# Altium PCB PCB1.PcbDoc (part 2 of 2)
Units mm, origin at the board's own origin, x right, y up, seen from the top; angles counter-clockwise.
Board outline 119.6 x 179.6 mm, 2 copper layers (Top Layer, Bottom Layer); 69 components, 72 nets, 360 pads, 26 vias.
Unrouted connection lines stored in the file: 3.
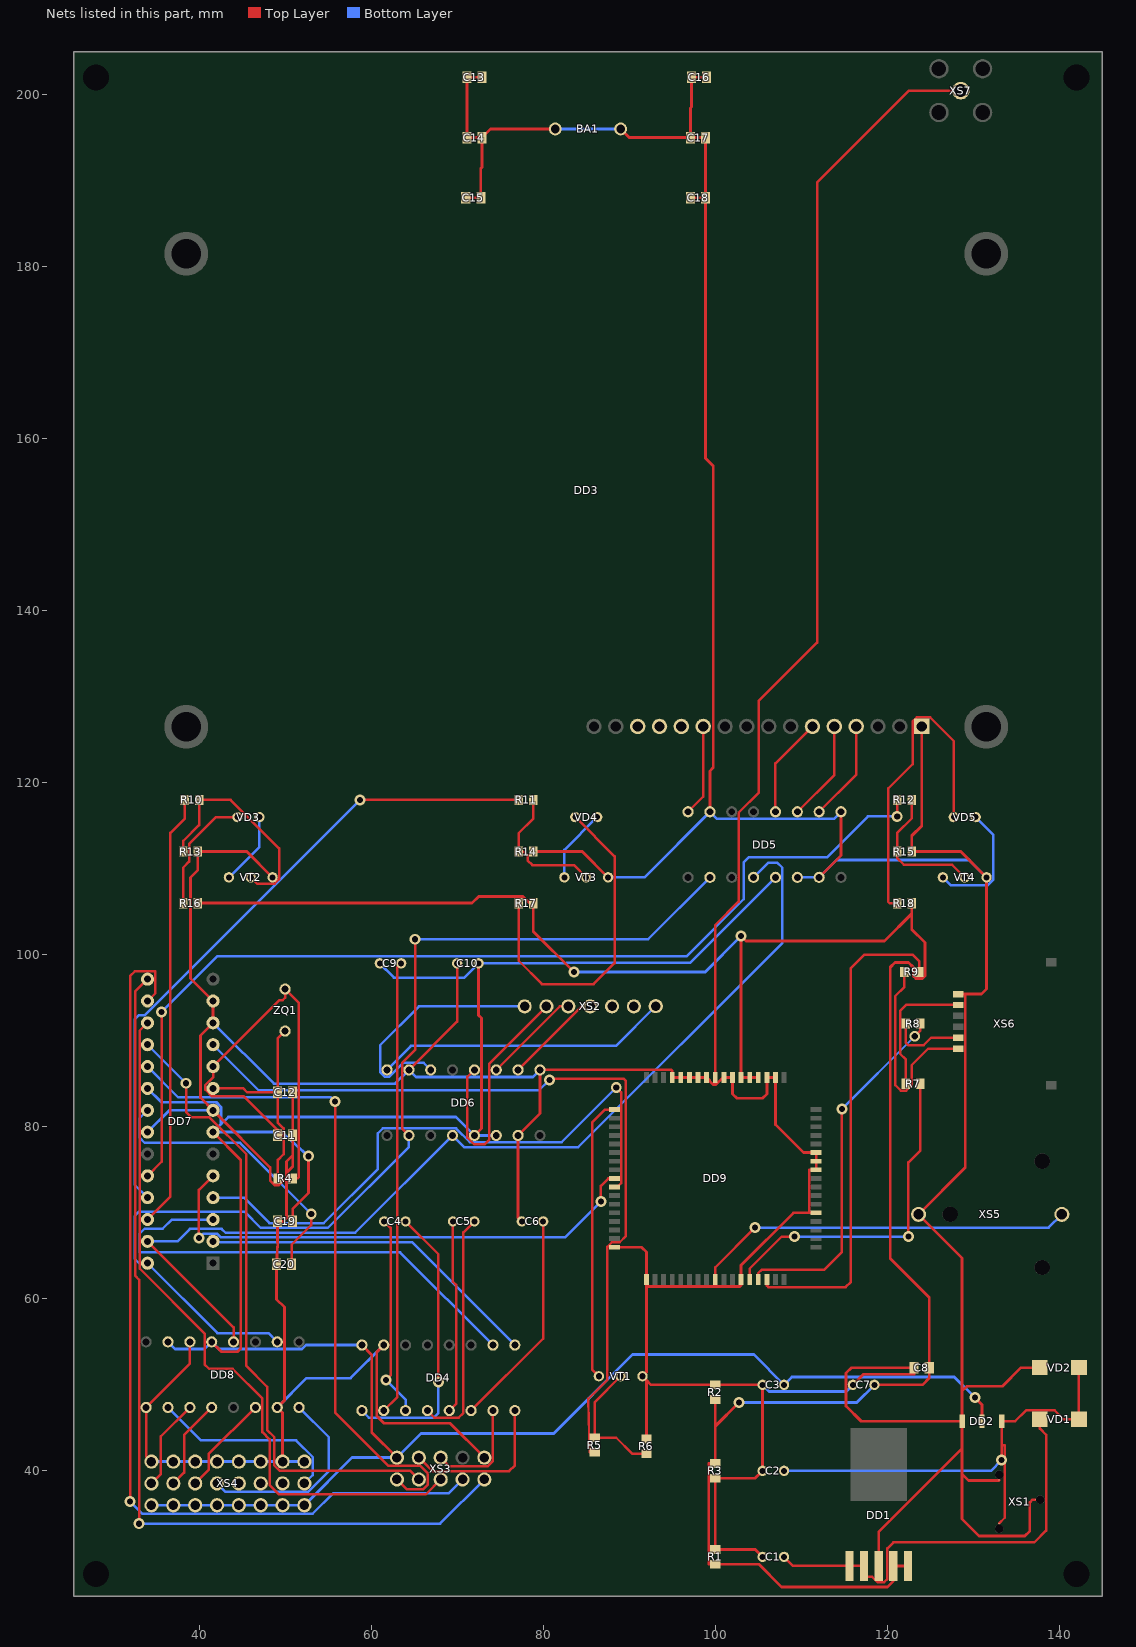
[diagram p2: the nets of this part, all layers, seen from the top]

## Part data
C1 C2 C3 C7: library part cap_pol_10mkF
C4 C5 C6 C9 C10: library part cap_pol_1mkF
C11 C12 C19 C20: library part cap_33pF
DD2: library part stu_NCP1117ST50T3G, "No Description Available", Copyright="Copyright (C) 2016 Accelerated Designs. All rights reserved", Manufacturer_Part_Number=NCP1117ST50T3G, RefDes=RefDes, SourceLibrary=ONSemi_2017-12-12_4, Type=DEV, Vendor="ON Semiconductor"
DD3: "Display Development Tools 20X4 CHARACTER BLUE LCD W/BACKLIGHT", Package=None, Availability=Unavailable, MF=Gravitech, Mouser-Purchase-URL=https://snapeda.com/shop?store=Mouser&id=833821, MP=LCD-20X4B, Price=None, SnapEDA_Link=https://www.snapeda.com/parts/LCD-20X4B/Gravitech/view-part/833821/?ref=snap
DD4: library part micro_MAX232, "No Description Available", Built_By=EMA_UL_Team, Copyright="Copyright (C) 2018 Accelerated Designs. All rights reserved", Manufacturer_Part_Number=MAX232CSE+, RefDes=RefDes, Revision=4, SourceLibrary=Update_to_database_2021-01-29, Type=DEV, Vendor="Maxim Integrated Products"
DD5 DD6 DD8: "Remote 8-Bit I/O Expander for I2C-Bus", Manufacturer="Texas Instruments", PACKAGE_DESIGNATOR=DGV, Copyright="Copyright (C) 2018 Accelerated Designs. All rights reserved", Datasheet_URL=http://www.ti.com/lit/gpn/PCF8574, FAMILY_NAME="I2C IO EXPANDER", GENERIC_PART_NUMBER=PCF8574, INDUSTRY_STD_PKG_TYPE=TVSOP, Manufacturer_Part_Number=PCF8574DGVR, PIN_COUNT=20, RefDes=RefDes, Type=DEV, Vendor="Texas Instruments"
DD7: "No Description Available", Built_By=EMA_UL_Team, Copyright="Copyright (C) 2018 Accelerated Designs. All rights reserved", Manufacturer_Part_Number=ATMEGA328P-PU, RefDes=RefDes, SourceLibrary=Atmel_2011-04-02, Type=DEV, Vendor=Atmel
VD4 VD5: library part diode_red
VT1 VT2 VT3 VT4: library part trans_BC547A
XS1: library part conn_DCJ200-10_powerIn
XS3: library part RS-232
XS4: library part temperature_sensors_connector
XS6: library part conn_SIM7200, "No Description Available", Manufacturer_Part_Number=SIM5051-6-0-18-00-A, Built_By=EMA_Cory, Copyright="Copyright (C) 2018 Accelerated Designs. All rights reserved", Datasheet=https://gct.co/files/drawings/sim5051.pdf, RefDes=RefDes, SourceLibrary=GCT_2020-07-23, Type=DEV, Vendor="Global Connector Technology"
XS7: library part conn_antenn
ZQ1: library part crystal_8mhz

## Free pads (board coordinates)
  round 1 hole 3 unplated: 6(28,28) 6(28,202) 6(142,28) 6(142,202)

## Via types
v1: diameter 1.27, hole 0.711, Top Layer to Bottom Layer, 26 vias

## Nets (pads, with @x,y where several pads share a name; then routed paths per layer and width w, separated by ;. In a path a pad name is that pad's centre, name@x,y a point inside that pad or via, vN(x,y) a via of type N, cw(c..) or ccw(c..) an arc to the next point about the centre after c; other vN are vias at no path point)
+5: C3.2 C9.1 C10.2 C19.2 DD2.2 DD4.16 DD5.5 DD6.5 DD6.6 DD7.7 DD7.20 DD8.5 DD8.7 XS3.2 XS4.1 XS4.4 XS4.7 XS4.10 XS4.13 XS4.16 XS4.19 XS4.22 | length 316.4
  Top Layer w0.323: DD8.5@41.46,55 42.612,53.848 44.441,53.848 44.831,54.238 44.831,76.169 DD7.7@41.62,79.38 ; C19.2@50.874,69 50.874,70.432 52.73,72.288 v1(52.73,76.581) ; DD4.16@58.92,54.62 60.071,53.469 60.071,44.469 XS3.2@63,41.54 ; DD6.5@72,79 72.822,79.822 72.822,92.631 72.489,92.964 C10.2@72.489,99 ; v1(130.175,48.514) 131,47.689 DD2.2@131,45.774
  Bottom Layer w0.323: DD7.20@34,84.46 35.605,82.855 41.986,82.855 42.545,82.296 42.545,80.305 ; XS4.1@34.46,36 XS4.4@37,36 XS4.7@39.54,36 XS4.10@42.08,36 XS4.13@44.62,36 XS4.16@47.16,36 XS4.19@49.7,36 XS4.22@52.24,36 57.78,41.54 XS3.2@63,41.54 65.808,44.348 81.229,44.348 90.399,53.518 104.482,53.518 C3.2@108,50 108.902,50.902 127.787,50.902 v1(130.175,48.514) ; DD8.7@36.38,55 37.202,54.178 40.638,54.178 DD8.5@41.46,55 42.282,54.178 51.968,54.178 52.41,54.62 DD4.16@58.92,54.62 ; v1(52.73,76.581) 49.555,79.38 DD7.7@41.62,79.38 42.545,80.305 ; C9.1@61,99 62.662,97.338 70.827,97.338 C10.2@72.489,99 82.704,99 82.765,99.061 97.061,99.061 DD5.5@107,109 ; DD6.6@74.54,79 DD6.5@72,79 69.847,81.153 43.393,81.153 42.545,80.305
GND: BA1.1 BA1.2 C1.1 C2.1 C3.1 C6.1 C7.1 C8.1 C10.1 C11.2 C12.2 C13.1 C13.2 C14.1 C14.2 C15.1 C15.2 C16.1 C16.2 C17.1 C17.2 C18.1 C18.2 C19.1 C20.1 DD1.3 DD2.1 DD3.1 DD4.15 DD5.6 DD5.7 DD5.9 DD5.15 DD6.7 DD6.9 DD6.15 DD7.8 DD7.12 DD7.13 DD7.22 DD8.6 DD8.9 DD8.15 DD9.17 DD9.18 DD9.29 DD9.39 DD9.44 DD9.45 DD9.46 DD9.53 DD9.54 DD9.58 DD9.59 DD9.61 DD9.62 DD9.63 DD9.64 DD9.65 R1.1 R2.1 R3.1 R6.2 R13.2 R14.2 R15.2 VD2.1 VT1.1 VT2.1 VT3.1 VT4.1 XS1.1 XS1.3 XS3.10 XS4.3 XS4.6 XS4.9 XS4.12 XS4.15 XS4.18 XS4.21 XS4.24 XS5.2 XS6.4 | length 814.5
  Top Layer w0.323: XS4.3@34.46,41.08 33.84,41.7 DD8.9@33.84,47.38 38.92,52.46 DD8.6@38.92,55 ; VT2.1@48.54,109 45.54,112 R13.2@39.848,112 39.848,109.85 38.989,108.991 38.989,97.251 DD7.13@41.62,94.62 DD7.12@41.62,92.08 40.152,90.612 40.152,83.388 DD7.8@41.62,81.92 48.26,75.28 48.26,73.736 48.768,73.228 49.276,73.228 50.165,74.117 ; C19.1@49.126,69 C19.1@49.126,68.986 ; XS4.21@49.7,41.08 49.7,46.76 DD8.15@49.08,47.38 49.911,48.211 49.911,59.033 49,59.944 C20.1@49,64 49.126,66.547 C19.1@49.126,68.986 ; C12.2@50.874,84 C11.2@50.874,79 50.874,76.68 ; DD4.15@61.46,54.62 60.648,53.808 60.648,46.387 61.506,45.53 69.17,45.53 XS3.10@73.16,41.54 ; DD6.15@64.38,86.62 70,92.24 C10.1@70,99 ; C15.1@71,188 C15.2@72.747,188 72.747,191.414 72.874,191.541 C14.2@72.874,195 ; C13.2@72.874,202 C13.1@71.127,202 C14.1@71.127,195 C14.2@72.874,195 ; C6.1@77.511,69 77.08,69.431 DD6.7@77.08,79 79.62,81.54 DD6.9@79.62,86.62 94.869,86.62 95,86.489 DD9.65@95,85.732 DD9.64@96,85.732 DD9.63@97,85.732 DD9.62@98,85.732 DD9.61@99,85.732 99.316,85.417 99.316,85.344 99.747,84.912 100.101,84.912 100.922,85.732 DD9.59@101,85.732 DD9.58@102,85.732 102,83.82 102.508,83.312 105.492,83.312 106,83.82 DD9.54@106,85.732 DD9.53@107,85.732 107,80.249 110.249,77 DD9.46@111.732,77 DD9.45@111.732,76 DD9.44@111.732,75 110.922,75 110.922,70 ; R14.2@78.848,112 84.54,112 VT3.1@87.54,109 ; BA1.2@81.4,196 73.874,196 C14.2@72.874,195 ; DD9.17@88.268,66 91.44,66 92,65.44 DD9.18@92,62.268 92,61.595 ; BA1.1@89,196 90,195 C17.1@97.127,195 ; R6.2@92,43.696 92,50.54 ; C18.1@97.127,188 C18.2@98.874,188 ; C16.2@99,202 C16.1@97.253,202 97.253,198.551 97.127,198.425 C17.1@97.127,195 ; DD5.15@99.38,116.62 99.38,121.361 99.771,121.752 99.771,156.82 98.874,157.717 C18.2@98.874,188 ; C1.1@105.5,30 104.652,30.848 R1.1@100,30.848 R3.1@100,39.152 104.652,39.152 C2.1@105.5,40 C3.1@105.5,50 R2.1@100,50 92.54,50 92,50.54 ; DD9.39@111.732,70 110.922,70 ; DD5.7@112.08,109 114.62,111.54 DD5.9@114.62,116.62 ; C7.1@116,50 117.232,51.232 123.126,51.232 C8.1@123.126,51.994 ; DD1.3@119,28.945 119,32.894 128.701,42.595 ; C8.1@123.126,52 C8.1@123.126,51.994 ; DD3.1@124,126.54 124,114.986 122.848,113.834 R15.2@122.848,112 128.54,112 VT4.1@131.54,109 131.54,96.031 130.939,95.43 128.905,95.43 ; XS6.4@128.25,95.43 128.905,95.43 ; XS1.1@133,38.95 133,38.888 129.437,38.888 128.701,39.624 ; XS1.3@137.2,36.65 136.898,36.65 136.57,36.322 136.57,33.02 135.986,32.436 130.657,32.436 128.701,34.392 128.701,39.624 ; VD2.1@137.73,52 135.566,52 133.4,49.834 129.26,49.834 128.701,49.276 ; C19.1@49.126,68.986 49.809,68.986 50.165,69.342 50.165,74.117 ; 50.165,74.117 50.165,74.651 ; 50.165,74.651 50.165,75.971 50.874,76.68 ; 50.165,74.651 50.874,75.359 50.874,76.68 ; 92,50.54 VT1.1@91.54,51 92,51.46 92,61.595 ; 92,61.595 92.152,61.443 102.87,61.443 103,61.573 DD9.29@103,62.268 103,63.907 109.093,70 110.922,70 ; C17.1@97.127,195 C17.2@98.874,195 C18.2@98.874,188 ; C8.1@123.126,51.994 115.824,51.994 115.214,51.384 115.214,47.523 116.967,45.771 DD2.1@128.701,45.771 ; 128.701,39.624 128.701,42.595 ; 128.701,42.595 DD2.1@128.701,45.771 ; DD2.1@128.701,45.771 128.701,49.276 ; 128.701,49.276 128.701,64.752 XS5.2@123.633,69.821 129.057,75.246 129.057,95.278 128.905,95.43
  Bottom Layer w0.323: DD7.22@34,79.38 36.54,81.92 DD7.8@41.62,81.92 ; XS4.3@34.46,41.08 XS4.6@37,41.08 XS4.9@39.54,41.08 XS4.12@42.08,41.08 XS4.15@44.62,41.08 XS4.18@47.16,41.08 XS4.21@49.7,41.08 XS4.24@52.24,41.08 ; DD7.12@41.62,92.08 48.686,85.014 62.774,85.014 DD6.15@64.38,86.62 65.199,85.801 78.801,85.801 DD6.9@79.62,86.62 ; DD8.15@49.08,47.38 52.475,50.775 57.615,50.775 DD4.15@61.46,54.62 ; BA1.2@81.4,196 BA1.1@89,196 ; VT3.1@87.54,109 91.76,109 DD5.15@99.38,116.62 100.201,115.799 113.799,115.799 DD5.9@114.62,116.62 ; C3.1@105.5,50 106.275,49.225 115.225,49.225 C7.1@116,50 ; DD5.6@109.54,109 DD5.7@112.08,109 114.103,111.023 129.517,111.023 VT4.1@131.54,109
NetC1_2: C1.2 DD1.1 DD1.2 VD1.2 | length 50.2
  Top Layer w0.29: C1.2@108,30 109.055,28.945 DD1.1@115.596,28.945 DD1.2@117.298,28.945 117.298,27.686 118.239,27.686 118.872,27.053 119.634,27.053 120.015,27.434 120.015,30.988 120.701,31.674 137.084,31.674 138.455,33.045 138.455,44.196 137.73,44.922 VD1.2@137.73,46
NetC2_2: C2.2 DD2.3 VD1.1 VD2.2 XS1.2 | length 56
  Top Layer w0.29: XS1.2@133,33.9 133.655,34.555 133.655,42.977 133.299,42.977 ; v1(133.299,41.25) 133.299,42.977 ; VD2.2@142.27,52 VD1.1@142.27,46 140.513,46 139.472,47.041 136.144,47.041 134.877,45.774 DD2.3@133.299,45.774 133.299,42.977
  Bottom Layer w0.29: C2.2@108,40 132.049,40 v1(133.299,41.25)
NetC4_1: C4.1 DD4.3 | length 23.5
  Top Layer w0.29: C4.1@61.511,69 62.255,68.255 62.255,51.105 v1(61.722,50.571)
  Bottom Layer w0.29: v1(61.722,50.571) 64,48.293 DD4.3@64,47
NetC4_2: C4.2 DD4.1 | length 33.3
  Top Layer w0.29: C4.2@64,69 67.818,65.182 v1(67.818,50.343)
  Bottom Layer w0.29: DD4.1@58.92,47 59.717,46.203 67.285,46.203 67.818,46.736 v1(67.818,50.343)
NetC5_1: C5.1 DD4.5 | length 22.5
  Top Layer w0.29: DD4.5@69.08,47 69.875,47.795 69.875,61.62 69.511,61.985 C5.1@69.511,69
NetC5_2: C5.2 DD4.4 | length 27.5
  Top Layer w0.29: DD4.4@66.54,47 67.337,46.203 70.18,46.203 70.714,46.736 70.714,67.714 C5.2@72,69
NetC6_2: C6.2 DD4.6 | length 25.5
  Top Layer w0.29: DD4.6@71.62,47 80,55.38 C6.2@80,69
NetC9_2: C9.2 DD4.2 | length 52.8
  Top Layer w0.29: DD4.2@61.46,47 63.041,48.581 63.041,98.552 C9.2@63.489,99
NetC11_1: C11.1 DD7.10 R4.2 ZQ1.2 | length 50
  Top Layer w0.29: C11.1@49.126,79 49.126,79.629 45.215,83.541 41.5,83.541 40.713,84.328 40.713,84.836 41.62,85.743 DD7.10@41.62,87 49.337,94.717 49.721,94.717 50,94.996 ZQ1.2@50,96 51.562,94.438 51.562,74.127 51.435,74 R4.2@50.848,74
NetC12_1: C12.1 DD7.9 R4.1 ZQ1.1 | length 25.7
  Top Layer w0.29: DD7.9@41.62,84.46 45.136,84.46 45.596,84 C12.1@49.126,84 ; R4.1@49.152,74 49.152,76.152 49.809,76.81 49.809,79.818 49.126,80.501 C12.1@49.126,84 ; ZQ1.1@50,91.12 49.126,90.247 C12.1@49.126,84
NetC20_2: C20.2 DD7.21 | length 34
  Top Layer w0.29: C20.2@50.747,64 50.747,66.292 53.035,68.58 v1(53.035,69.85)
  Bottom Layer w0.29: DD7.21@34,81.92 33.071,80.991 33.071,78.74 33.68,78.13 44.755,78.13 v1(53.035,69.85)
NetDD3_4: DD3.4 DD5.10 | length 11.7
  Top Layer w0.29: DD5.10@112.08,116.62 116.38,120.92 DD3.4@116.38,126.54
NetDD3_5: DD3.5 DD5.11 | length 11.7
  Top Layer w0.29: DD5.11@109.54,116.62 113.84,120.92 DD3.5@113.84,126.54
NetDD3_6: DD3.6 DD5.12 | length 11.7
  Top Layer w0.29: DD5.12@107,116.62 107,122.24 DD3.6@111.3,126.54
NetDD3_11: DD3.11 DD5.16 | length 10.6
  Top Layer w0.29: DD5.16@96.84,116.62 98.6,118.38 DD3.11@98.6,126.54
NetDD3_12: DD3.12
NetDD3_13: DD3.13
NetDD3_14: DD3.14
NetDD4_7: DD4.7 XS3.6 | length 12.6
  Top Layer w0.29: XS3.6@68.08,41.54 69.106,40.514 73.526,40.514 74.16,41.148 DD4.7@74.16,47
NetDD4_8: DD4.8 XS3.4 | length 18.4
  Top Layer w0.29: XS3.4@65.54,41.54 67.11,39.97 76.03,39.97 76.7,40.64 DD4.8@76.7,47
NetDD4_9: DD4.9 DD7.2 | length 40.1
  Bottom Layer w0.29: DD7.2@41.62,66.68 41.983,66.68 41.983,66.591 64.729,66.591 DD4.9@76.7,54.62
NetDD4_10: DD4.10 DD7.3 | length 56.9
  Bottom Layer w0.29: DD7.3@41.62,69.22 36.835,69.22 35.763,68.148 33.655,68.148 33.071,67.564 33.071,65.43 33.096,65.405 63.375,65.405 DD4.10@74.16,54.62
NetDD5_2: DD5.2 DD6.2 DD7.28 DD8.2 | length 124.6
  Top Layer w0.29: DD6.2@64.38,79 63.585,79.795 63.585,87.427 65.1,88.942 v1(65.1,101.803)
  Bottom Layer w0.29: DD8.2@49.08,55 48.073,56.007 42.133,56.007 DD7.28@34,64.14 33.02,64.14 32.512,64.648 32.512,69.621 33.02,70.129 45.281,70.129 47.146,68.265 54.98,68.265 64.38,77.664 DD6.2@64.38,79 ; v1(65.1,101.803) 92.183,101.803 DD5.2@99.38,109
NetDD5_4: DD5.4 DD6.4 DD7.27 DD8.4 | length 118.5
  Top Layer w0.29: DD7.27@34,66.68 44,56.68 DD8.4@44,55
  Bottom Layer w0.29: DD7.27@34,66.68 37.476,66.68 38.935,68.139 42.611,68.139 43.071,67.679 58.139,67.679 DD6.4@69.46,79 70.812,77.648 84.072,77.648 107.798,101.374 107.798,110.109 107.188,110.719 106.179,110.719 DD5.4@104.46,109
NetDD6_10: DD6.10 XS2.4 | length 11.4
  Top Layer w0.29: DD6.10@77.08,86.62 84.46,94 XS2.4@85.46,94
NetDD6_11: DD6.11 XS2.5 | length 11.4
  Top Layer w0.29: DD6.11@74.54,86.62 81.92,94 XS2.5@82.92,94
NetDD6_12: DD6.12 XS2.6 | length 29.5
  Top Layer w0.29: DD6.12@72,86.62 71.196,85.816 71.196,78.74 71.984,77.953 73.152,77.953 73.736,78.537 73.736,87.356 XS2.6@80.38,94
NetDD6_14: DD6.14 XS2.7 | length 28.9
  Bottom Layer w0.29: DD6.14@66.92,86.62 66.113,87.427 63.703,87.427 62.078,85.801 61.595,85.801 61.036,86.36 61.036,89.484 65.552,94 XS2.7@77.84,94
NetDD6_16: DD6.16 XS2.1 | length 34.3
  Bottom Layer w0.29: DD6.16@61.84,86.62 64.628,89.408 88.463,89.408 XS2.1@93.08,94.025
NetDD6_17: XS2.2
NetDD6_19: XS2.3
NetDD7_4: DD7.4 DD9.10 | length 70.7
  Top Layer w0.29: DD9.10@88.268,73 88.621,73 89.058,73.437 89.058,83.992 v1(88.494,84.557)
  Bottom Layer w0.29: DD7.4@41.62,71.76 45.207,71.76 48.158,68.809 54.483,68.809 60.782,75.108 60.782,79.248 61.341,79.807 69.875,79.807 71.477,78.205 82.142,78.205 v1(88.494,84.557)
NetDD7_5: DD7.5 DD9.9 | length 60.5
  Top Layer w0.29: v1(39.98,67.081) 39.98,72.66 DD7.5@41.62,74.3 ; v1(86.716,71.323) 86.716,73.127 87.589,74 DD9.9@88.268,74
  Bottom Layer w0.29: v1(39.98,67.081) 40.485,67.587 42.067,67.587 42.52,67.135 82.527,67.135 v1(86.716,71.323)
NetDD7_11: DD7.11 R5.1 | length 97
  Top Layer w0.29: v1(80.721,85.446) 80.886,85.61 89.345,85.61 89.611,85.344 89.611,67.285 88.9,66.573 87.986,66.573 87.452,66.04 87.452,50.597 85.242,48.387 85.381,42.152 R5.1@86,42.152
  Bottom Layer w0.29: DD7.11@41.62,89.54 46.908,84.252 79.527,84.252 v1(80.721,85.446)
NetDD7_15: DD7.15 XS3.9 | length 106.4
  Top Layer w0.29: v1(33.02,33.858) 33.02,62.218 32.549,62.689 32.549,95.709 DD7.15@34,97.16
  Bottom Layer w0.29: v1(33.02,33.858) 68.018,33.858 XS3.9@73.16,39
NetDD7_16: DD7.16 XS3.7 | length 108.9
  Top Layer w0.29: v1(31.979,36.424) 31.979,97.536 32.512,98.069 34.882,98.069 34.907,95.527 DD7.16@34,94.62
  Bottom Layer w0.29: v1(31.979,36.424) 33.372,35.03 53.213,35.03 55.572,37.389 69.009,37.389 XS3.7@70.62,39
NetDD7_17: DD7.17 XS3.5 | length 83
  Top Layer w0.29: DD7.17@34,92.08 33.093,91.173 33.093,63.503 40.64,55.956 40.64,52.375 41.148,51.867 43.891,51.867 47.346,48.412 47.346,44.501 48.186,43.66 48.186,38.352 49.276,37.262 66.342,37.262 XS3.5@68.08,39
NetDD7_18: DD7.18 XS3.3 | length 73.7
  Top Layer w0.29: v1(38.481,85.059) 38.481,81.737 39.116,81.102 41.199,81.102 45.491,76.81 45.491,52.197 47.904,49.784 47.904,44.755 48.73,43.929 48.73,40.64 49.344,40.026 64.514,40.026 XS3.3@65.54,39
  Bottom Layer w0.29: DD7.18@34,89.54 v1(38.481,85.059)
NetDD7_19: DD7.19 XS3.1 | length 79
  Top Layer w0.29: v1(55.804,82.931) 55.804,46.793 62.027,40.57 65.729,40.57 66.599,39.7 66.599,38.405 66.04,37.846 64.154,37.846 XS3.1@63,39
  Bottom Layer w0.29: DD7.19@34,87 37.561,83.439 55.296,83.439 v1(55.804,82.931)
NetDD7_24: DD7.24 R12.1 | length 119.1
  Top Layer w0.29: DD7.24@34,74.3 35.636,75.936 v1(35.636,93.345) ; v1(121.152,116.078) R12.1@121.152,118
  Bottom Layer w0.29: v1(35.636,93.345) 42.139,99.847 96.698,99.847 103.302,106.451 103.302,110.744 103.911,111.354 113.03,111.354 117.754,116.078 v1(121.152,116.078)
NetDD7_25: DD7.25 R11.1 | length 76.5
  Top Layer w0.29: v1(58.716,118) R11.1@77.152,118
  Bottom Layer w0.29: DD7.25@34,71.76 32.512,73.248 32.512,92.481 33.02,92.989 33.706,92.989 v1(58.716,118)
NetDD7_26: DD7.26 R10.1 | length 50.6
  Top Layer w0.29: DD7.26@34,69.22 36.67,71.89 36.67,114.165 38.304,115.799 R10.1@38.304,118
NetDD8_10: DD8.10 XS4.23 | length 22.7
  Bottom Layer w0.29: DD8.10@36.38,47.38 40.224,43.536 51.283,43.536 53.213,41.605 53.213,39.513 XS4.23@52.24,38.54
NetDD8_11: DD8.11 XS4.2 | length 10.7
  Top Layer w0.29: XS4.2@34.46,38.54 35.56,39.64 35.56,44.02 DD8.11@38.92,47.38
NetDD8_12: DD8.12 XS4.5 | length 10.7
  Top Layer w0.29: XS4.5@37,38.54 38.262,39.802 38.262,44.182 DD8.12@41.46,47.38
NetDD8_14: DD8.14 XS4.8 | length 11.7
  Top Layer w0.29: XS4.8@39.54,38.54 41.11,40.11 41.11,41.95 DD8.14@46.54,47.38
NetDD8_16: DD8.16 XS4.11 | length 23.3
  Bottom Layer w0.29: XS4.11@42.08,38.54 43.053,37.567 52.68,37.567 55.093,39.98 55.093,43.907 DD8.16@51.62,47.38
NetDD8_17: XS4.14
NetDD8_19: XS4.17
NetDD8_20: XS4.20
NetDD9_1: DD9.1 VT1.3 | length 33
  Top Layer w0.29: VT1.3@86.46,51 85.682,51.778 85.682,80.5 87.182,82 DD9.1@88.268,82
NetDD9_26: DD9.26 XS5.1 | length 44.2
  Top Layer w0.29: DD9.26@100,62.268 100,63.652 v1(104.623,68.275)
  Bottom Layer w0.29: v1(104.623,68.275) 138.747,68.275 XS5.1@140.292,69.821
NetDD9_30: DD9.30 R7.2 | length 39.6
  Top Layer w0.29: DD9.30@104,62.268 104,63.5 107.734,67.234 v1(109.195,67.234) ; v1(122.453,67.234) 122.453,75.868 123.848,77.262 R7.2@123.848,85
  Bottom Layer w0.29: v1(109.195,67.234) v1(122.453,67.234)
NetDD9_31: DD9.31 R8.2 | length 41.8
  Top Layer w0.29: DD9.31@105,62.268 105,62.992 105.381,63.373 112.649,63.373 114.732,65.456 v1(114.732,82.067) ; v1(123.19,90.526) 123.848,91.184 R8.2@123.848,92
  Bottom Layer w0.29: v1(114.732,82.067) v1(123.19,90.526)
NetDD9_32: DD9.32 R9.2 | length 57.5
  Top Layer w0.29: DD9.32@106,62.268 106,61.538 106.172,61.366 115.164,61.366 115.773,61.976 115.773,98.45 117.348,100.025 122.936,100.025 123.696,99.265 R9.2@123.696,98
NetDD9_60: DD9.60 XS7.1 | length 130.1
  Top Layer w0.29: DD9.60@100,85.732 100,103.454 102.718,106.172 102.718,116.51 105.08,118.872 105.08,129.54 111.836,136.296 111.836,189.789 122.507,200.46 XS7.1@128.54,200.46
NetR5_2: R5.2 R6.1 VT1.2 | length 15.2
  Top Layer w0.29: VT1.2@89,51 86,48 R5.2@86,43.848 88.486,43.848 90.334,42 R6.1@92,42
NetR7_1: R7.1 XS6.1 | length 15.8
  Top Layer w0.29: R7.1@122.152,85 122.152,87.83 121.488,88.494 121.488,93.472 122.176,94.16 XS6.1@128.25,94.16
NetR8_1: R8.1 XS6.6 | length 8.8
  Top Layer w0.29: R8.1@122.152,92 122.152,89.756 122.428,89.48 124.22,89.48 125.09,90.35 XS6.6@128.25,90.35
NetR9_1: R9.1 XS6.3 | length 24.6
  Top Layer w0.29: R9.1@122,98 122,96.27 120.929,95.199 120.929,84.836 121.564,84.201 122.199,84.201 122.834,84.836 122.834,87.15 124.764,89.08 XS6.3@128.25,89.08
NetR10_2: R10.2 R13.1 VT2.2 | length 25.8
  Top Layer w0.29: R13.1@38.152,112 38.152,113.234 40,115.082 R10.2@40,118 43.663,118 49.301,112.361 49.301,108.788 48.768,108.255 46.745,108.255 VT2.2@46,109
NetR11_2: R11.2 R14.1 VT3.2 | length 16.1
  Top Layer w0.29: R11.2@78.848,118 78.848,115.844 77.152,114.148 R14.1@77.152,112 77.724,112 78.181,111.543 78.181,110.973 78.74,110.414 83.586,110.414 VT3.2@85,109
NetR12_2: R12.2 R15.1 VT4.2 | length 16.2
  Top Layer w0.29: R12.2@122.848,118 122.848,115.844 121.152,114.148 R15.1@121.152,112 121.152,111.233 121.92,110.465 127.535,110.465 VT4.2@129,109
NetR16_1: R16.1 VD3.1 | length 14.1
  Top Layer w0.29: R16.1@38.152,106 38.152,110.136 38.837,110.82 38.837,112.878 41.959,116 VD3.1@44.46,116
NetR17_1: R17.1 VD4.1 | length 38.8
  Top Layer w0.29: R17.1@77.152,106 77.152,99.302 79.858,96.596 85.852,96.596 88.29,99.035 88.29,111.44 VD4.1@83.73,116
NetR18_1: R18.1 VD5.1 | length 38.2
  Top Layer w0.29: R18.1@121.152,106 120.269,106 120.117,106.152 120.117,119.329 122.936,122.149 122.936,127.102 123.444,127.61 124.968,127.61 127.73,124.848 VD5.1@127.73,116
NetVD3_2: VD3.2 VT2.3 | length 8.5
  Bottom Layer w0.29: VT2.3@43.46,109 47,112.54 VD3.2@47,116
NetVD4_2: VD4.2 VT3.3 | length 8.6
  Bottom Layer w0.29: VT3.3@82.46,109 82.46,112.19 VD4.2@86.27,116
NetVD5_2: VD5.2 VT4.3 | length 14.6
  Bottom Layer w0.29: VT4.3@126.46,109 127.358,108.102 131.699,108.102 132.309,108.712 132.309,113.961 VD5.2@130.27,116
VBAT: C7.2 C8.2 DD1.4 DD1.5 DD9.55 DD9.56 DD9.57 R1.2 R2.2 R3.2 R16.2 R17.2 R18.2 | length 248.5
  Top Layer w0.323: R16.2@39.848,106 71.72,106 72.502,106.782 77.622,106.782 78.404,106 R17.2@78.848,106 78.848,102.711 v1(83.566,97.993) ; R2.2@100,48.304 100,45.187 ; v1(102.768,47.955) 100,45.187 ; DD9.55@105,85.732 DD9.56@104,85.732 DD9.57@103,85.732 v1(103,102.159) 103.559,101.6 119.685,101.6 122.848,104.763 ; C7.2@118.5,50 124.074,50 124.874,50.8 C8.2@124.874,52 124.874,60.14 120.345,64.668 120.345,98.552 120.904,99.111 122.453,99.111 123.012,98.552 123.012,97.536 123.317,97.231 124.079,97.231 124.384,97.536 124.384,101.422 122.848,102.958 122.848,104.763 ; DD1.5@122.404,28.945 DD1.4@120.702,28.945 120.702,27.178 120.016,26.492 107.721,26.492 105.062,29.152 R1.2@100,29.152 99.238,29.152 99.238,40.848 R3.2@100,40.848 100,44.552 100,45.187 ; R18.2@122.848,106 122.848,104.763
  Bottom Layer w0.323: v1(83.566,97.993) 98.834,97.993 v1(103,102.159) ; v1(102.768,47.955) 116.455,47.955 C7.2@118.5,50
pads on no net: DD1.6 DD3.2 DD3.3 DD3.7 DD3.8 DD3.9 DD3.10 DD3.15 DD3.16 DD3.S1 DD3.S2 DD3.S3 DD3.S4 DD4.11 DD4.12 DD4.13 DD4.14 DD5.1 DD5.3 DD5.8 DD5.13 DD5.14 DD6.1 DD6.3 DD6.8 DD6.13 DD7.1 DD7.6 DD7.14 DD7.23 DD8.1 DD8.3 DD8.8 DD8.13 DD9.2 DD9.3 DD9.4 DD9.5 DD9.6 DD9.7 DD9.8 DD9.11 DD9.12 DD9.13 DD9.14 DD9.15 DD9.16 DD9.19 DD9.20 DD9.21 DD9.22 DD9.23 DD9.24 DD9.25 DD9.27 DD9.28 DD9.33 DD9.34 DD9.35 DD9.36 DD9.37 DD9.38 DD9.40 DD9.41 DD9.42 DD9.43 DD9.47 DD9.48 DD9.49 DD9.50 DD9.51 DD9.52 DD9.66 DD9.67 DD9.68 XS1. XS3.8 XS5. XS6. XS6.2 XS6.5 XS7.2 XS7.3 XS7.4 XS7.5

## Silkscreen, mask and mechanical layers (free items; w line width, h text height)
Mechanical 7:
  text "BOASFORMAT|А1|1|0|766141733|331102362|1000000000|1:1|" at 0,2540 h0
  text "DimV|0|-141338583|126771654|963385827|6692913|-72834646|2||||js12|False|False|False|False" at 322,2447 h0
  text "DimH|-94094489|0|126771654|963385827|-47637796|14173228|2||||js12|False|False|False|False" at 322,2447 h0
  text "BOASVIADRILLTABLE:none,280000,26" at 0,0 h0
  text "2BOASDRILLTABLE:none,275591,есть,36,True|none,314961,есть,66,True|none,320000,есть,28,True|none,393701,есть,5,True|none,433071,есть,41,True|none,472441,есть,18,True|none,590551,есть,1,True|none,669291,есть,4,True|none,708661,нет,3,False|none,1181102,нет,4,False|none,1338583,есть,4,True" at 0,0 h0
Mechanical 8:
  region: 338.908,2446.908 338.261,2445.215 337.77,2441.501 338.904,2441.5 338.905,2442.432 338.342,2442 338.997,2446.907
  region: 339.092,2446.908 339.739,2445.215 340.23,2441.501 339.096,2441.5 339.095,2442.432 339.658,2442 339.003,2446.907
  region: 339.092,2088.092 339.739,2089.785 340.23,2093.499 339.096,2093.5 339.095,2092.568 339.658,2093 339.003,2088.093
  region: 338.908,2088.092 338.261,2089.785 337.77,2093.499 338.904,2093.5 338.905,2092.568 338.342,2093 338.997,2088.093
  region: 321.908,2483.092 320.215,2483.739 316.501,2484.23 316.5,2483.096 317.432,2483.095 317,2483.658 321.907,2483.003
  region: 321.908,2482.908 320.215,2482.261 316.501,2481.77 316.5,2482.904 317.432,2482.905 317,2482.342 321.907,2482.997
  region: 83.092,2482.908 84.785,2482.261 88.499,2481.77 88.5,2482.904 87.568,2482.905 88,2482.342 83.093,2482.997
  region: 83.092,2483.092 84.785,2483.739 88.499,2484.23 88.5,2483.096 87.568,2483.095 88,2483.658 83.093,2483.003
Mechanical 9:
  region: 339,2447 339.658,2442 339,2442.5 338.342,2442
  region: 339,2088 338.342,2093 339,2092.5 339.658,2093
  region: 322,2483 317,2482.342 317.5,2483 317,2483.658
  region: 83,2483 88,2483.658 87.5,2483 88,2482.342
  lines w0.18: 83,2447 83,2484 ; 83,2483 322,2483 ; 322,2088 340,2088 ; 322,2484 322,2447 340,2447 ; 339,2088 339,2447
  text "120" at 196.965,2485.53 h7.68
  text "180" at 336.47,2261.429 h7.68 r90
Mechanical 13:
  lines w0.18: 651,1956 716,1956 ; 651,1961 716,1961 ; 651,1966 716,1966 ; 651,1971 716,1971 ; 651,1976 716,1976 ; 651,1991 716,1991 ; 651,1996 716,1996 ; 651,2001 716,2001 ; 790.96,1971 790.96,1986 ; 795.98,1971 795.98,1986 ; 812.7,2522.1 815.8,2516.7 821.4,2526.5 ; 0,1946 0,2540 841,2540 841,1946 0,1946
  lines w0.6: 8,1976 20,1976 ; 8,2011 20,2011 ; 8,2036 20,2036 ; 8,2061 20,2061 ; 8,2178 20,2178 ; 13,1951 13,2096 ; 13,2118 13,2238 ; 20,2096 8,2096 8,1951 20,1951 ; 20,2118 8,2118 8,2238 20,2238 ; 20,2521 90,2521 ; 104,2521 104,2535 ; 104,2528 156,2528 ; 651,1951 651,2006 836,2006 ; 651,1981 716,1981 ; 651,1986 716,1986 ; 658,1981 658,2006 ; 668,1951 668,2006 ; 691,1951 691,2006 ; 706,1951 706,2006 ; 716,1951 716,2006 ; 716,1966 786,1966 836,1966 ; 716,1991 836,1991 ; 765,2524 770,2515 777.6,2529 ; 777.7,2529 828,2529 ; 786,1951 786,1991 ; 786,1971 836,1971 ; 786,1986 801,1986 836,1986 ; 801,1971 801,1991 ; 806.57,1966 806.57,1971 ; 818,1971 818,1991 ; 20,1951 836,1951 836,2535 20,2535 20,1951 ; 90,2521 90,2535 156,2535 156,2521 90,2521 ; 716,2006 716,2014 836,2014 836,2006 ; 716,2006 836,2006
  text "Rz 160" at 777.7,2516.7 h10.75
  text "(" at 809,2516.7 h10.75
  text ")" at 820,2516.7 h10.75
  text "Перв. примен." at 12.249,2195.536 h5.38 r90
  text "Справ. №" at 12.249,2139.516 h5.38 r90
  text "Подп. и дата" at 12.249,2067.038 h5.38 r90
  text "Инв. № дубл." at 12.249,2037.663 h5.38 r90
  text "Взам. инв. №" at 12.249,2012.667 h5.38 r90
  text "Лит." at 789.728,1986.751 h5.38
  text "Масса" at 804.232,1986.751 h5.38
  text "Масштаб" at 818.813,1986.751 h5.38
  text "Подп. и дата" at 12.249,1983.538 h5.38 r90
  text "№ докум." at 671.975,1982.251 h5.38
  text "Изм." at 651.166,1981.751 h5.38
  text "Лист" at 658.288,1981.751 h5.38
  text "Подп." at 694.228,1981.751 h5.38
  text "Дата" at 706.188,1981.751 h5.38
  text "Разраб." at 651.533,1976.771 h5.38
  text "19 г" at 804.73,1976.001 h7.68
  text "1:1" at 824.426,1976.001 h7.68
  text "Пров." at 651.533,1971.771 h5.38
  text "Т.контр." at 651.533,1966.771 h5.38
  text "Лист" at 787.442,1966.771 h5.38
  text "Листов" at 808.485,1966.771 h5.38
  text "1" at 828.318,1966.771 h5.38
  text "Н.контр." at 651.533,1956.771 h5.38
  text "Инв. № подл." at 12.249,1952.663 h5.38 r90
  text "Утв." at 651.533,1951.771 h5.38
  text "Копировал" at 726.533,1946.771 h5.38
  text "Формат" at 796.533,1946.771 h5.38
  text "А1" at 817.686,1946.771 h5.38

## Text inside footprints (layer, text, board x,y; h text height)
BA1: Top Overlay "-" at 77.169,196.127 h1.27 r180; Top Overlay "+" at 94.337,196 h1.27 r180
DD1: Top Overlay "*" at 113.793,28.31 h1.27
DD4: Top Overlay "*" at 58.133,46.682 h1.27 r90
DD5: Top Overlay "*" at 96.065,108.683 h1.27 r90
DD6: Top Overlay "*" at 61.065,78.682 h1.27 r90
DD7: Top Overlay "*" at 41.938,63.251 h1.27 r180
DD8: Top Overlay "*" at 52.395,55.317 h1.27 r270
DD9: Top Overlay "*" at 86.67,81.865 h1.27
Designator1: Mechanical 7 "92" at 309.836,2078.8 h7.68; Mechanical 7 "88" at 299.68,2078.8 h7.68; Mechanical 7 "84" at 290.074,2078.8 h7.68; Mechanical 7 "80" at 279.595,2078.8 h7.68; Mechanical 7 "76" at 270.231,2078.8 h7.68; Mechanical 7 "72" at 260.014,2078.8 h7.68; Mechanical 7 "68" at 249.68,2078.8 h7.68; Mechanical 7 "64" at 240.074,2078.8 h7.68; Mechanical 7 "60" at 229.595,2078.8 h7.68; Mechanical 7 "56" at 219.879,2078.8 h7.68; Mechanical 7 "52" at 209.662,2078.8 h7.68; Mechanical 7 "48" at 199.733,2078.8 h7.68; Mechanical 7 "44" at 190.128,2078.8 h7.68; Mechanical 7 "40" at 179.648,2078.8 h7.68; Mechanical 7 "36" at 169.879,2078.8 h7.68; Mechanical 7 "32" at 159.662,2078.8 h7.68; Mechanical 7 "28" at 149.555,2078.8 h7.68; Mechanical 7 "24" at 139.95,2078.8 h7.68; Mechanical 7 "20" at 129.47,2078.8 h7.68; Mechanical 7 "16" at 120.775,2078.8 h7.68; Mechanical 7 "12" at 110.558,2078.8 h7.68; Mechanical 7 "8" at 101.29,2078.8 h7.68; Mechanical 7 "4" at 91.738,2078.8 h7.68; Mechanical 7 "0" at 81.205,2078.8 h7.68; Mechanical 7 "140" at 70.867,2435.501 h7.68; Mechanical 7 "136" at 71.691,2425.501 h7.68; Mechanical 7 "132" at 71.258,2415.501 h7.68; Mechanical 7 "128" at 71.037,2405.501 h7.68; Mechanical 7 "124" at 71.827,2395.501 h7.68; Mechanical 7 "120" at 70.867,2385.501 h7.68; Mechanical 7 "116" at 72.402,2375.501 h7.68; Mechanical 7 "112" at 71.969,2365.501 h7.68; Mechanical 7 "108" at 71.037,2355.501 h7.68; Mechanical 7 "104" at 71.827,2345.501 h7.68; Mechanical 7 "100" at 70.867,2335.501 h7.68; Mechanical 7 "96" at 73.106,2325.501 h7.68; Mechanical 7 "92" at 72.673,2315.501 h7.68; Mechanical 7 "88" at 72.36,2305.501 h7.68; Mechanical 7 "84" at 73.149,2295.501 h7.68; Mechanical 7 "80" at 72.189,2285.501 h7.68; Mechanical 7 "76" at 73.462,2275.501 h7.68; Mechanical 7 "72" at 73.028,2265.501 h7.68; Mechanical 7 "68" at 72.36,2255.501 h7.68; Mechanical 7 "64" at 73.149,2245.501 h7.68; Mechanical 7 "60" at 72.189,2235.501 h7.68; Mechanical 7 "56" at 72.758,2225.501 h7.68; Mechanical 7 "52" at 72.324,2215.501 h7.68; Mechanical 7 "48" at 72.466,2205.501 h7.68; Mechanical 7 "44" at 73.256,2195.501 h7.68; Mechanical 7 "40" at 72.296,2185.501 h7.68; Mechanical 7 "36" at 72.758,2175.501 h7.68; Mechanical 7 "32" at 72.324,2165.501 h7.68; Mechanical 7 "28" at 72.111,2155.501 h7.68; Mechanical 7 "24" at 72.9,2145.501 h7.68; Mechanical 7 "20" at 71.94,2135.501 h7.68; Mechanical 7 "16" at 74.549,2125.501 h7.68; Mechanical 7 "12" at 74.116,2115.501 h7.68; Mechanical 7 "8" at 75.58,2105.501 h7.68; Mechanical 7 "4" at 76.476,2095.501 h7.68; Mechanical 7 "0" at 75.41,2085.501 h7.68
Designator1: Mechanical 7 "А(2:1)" at 189.094,2462.92 h15.36; Mechanical 7 "Слой маркировки" at 172.824,2451.2 h10.72; Mechanical 12 "C15" at 172.874,2416.832 h3.05; Mechanical 12 "R10" at 107.532,2276.68 h3.05; Mechanical 12 "VD1" at 305.656,2134.292 h3.05; Mechanical 12 "R15" at 273.228,2264.68 h3.05; Mechanical 12 "XS1" at 289.183,2120.294 h3.05; Mechanical 12 "C16" at 225.38,2444.832 h3.05; Mechanical 12 "C13" at 173.127,2444.832 h3.05; Mechanical 12 "C11" at 129.127,2198.832 h3.05; Mechanical 12 "DD4" at 146.711,2150.025 h3.05; Mechanical 12 "C20" at 128.874,2168.832 h3.05; Mechanical 12 "DD8" at 97.89,2150.789 h3.05; Mechanical 12 "VD2" at 304.215,2146.262 h3.05; Mechanical 12 "R12" at 273.228,2276.68 h3.05; Mechanical 12 "R18" at 273.228,2252.68 h3.05; Mechanical 12 "XS6" at 287.165,2238.774 h3.05; Mechanical 12 "R9" at 274.96,2236.705 h3.05; Mechanical 12 "R8" at 275.246,2224.684 h3.05; Mechanical 12 "R7" at 275.216,2210.663 h3.05; Mechanical 12 "XS5" at 273.341,2197.961 h3.05; Mechanical 12 "DD2" at 287.266,2145.436 h3.05; Mechanical 12 "C8" at 277.127,2144.832 h3.05; Mechanical 12 "C7" at 260.771,2145.15 h3.05; Mechanical 12 "DD1" at 259.354,2129.329 h3.05; Mechanical 12 "C17" at 225.127,2430.832 h3.05; Mechanical 12 "C14" at 173.127,2430.832 h3.05; Mechanical 12 "C18" at 225.127,2416.832 h3.05; Mechanical 12 "VD4" at 195.317,2277.099 h3.05; Mechanical 12 "DD5" at 222.551,2274.003 h3.05; Mechanical 12 "VT3" at 195.541,2260.656 h3.05; Mechanical 12 "DD9" at 205.911,2212.759 h3.05; Mechanical 12 "ZQ1" at 127.095,2237.804 h3.05; Mechanical 12 "C9" at 148.485,2242.896 h3.05; Mechanical 12 "C12" at 129.127,2208.832 h3.05; Mechanical 12 "R4" at 129.228,2188.68 h3.05; Mechanical 12 "C19" at 129.127,2178.832 h3.05; Mechanical 12 "XS3" at 147.347,2124.245 h3.05; Mechanical 12 "DD7" at 98.438,2237.617 h3.05; Mechanical 12 "XS4" at 97.405,2123.974 h3.05; Mechanical 12 "R1" at 230.777,2102.173 h3.05; Mechanical 12 "R14" at 185.228,2264.68 h3.05; Mechanical 12 "C6" at 181.507,2182.896 h3.05; Mechanical 12 "C5" at 165.507,2182.896 h3.05; Mechanical 12 "C4" at 149.507,2182.896 h3.05; Mechanical 12 "R13" at 107.228,2264.68 h3.05; Mechanical 12 "VD5" at 283.317,2277.099 h3.05; Mechanical 12 "VT4" at 283.524,2260.643 h3.05; Mechanical 12 "*" at 259.786,2093.82 h2.54; Mechanical 12 "R2" at 230.777,2140.476 h3.05; Mechanical 12 "C3" at 239.771,2145.15 h3.05; Mechanical 12 "R3" at 230.745,2122.188 h3.05; Mechanical 12 "C2" at 239.771,2125.15 h3.05; Mechanical 12 "C1" at 239.771,2105.15 h3.05; Mechanical 12 "+" at 220.875,2429.2 h2.55 r180; Mechanical 12 "R6" at 214.743,2127.91 h3.05; Mechanical 12 "VT1" at 203.567,2144.666 h3.05; Mechanical 12 "R5" at 202.767,2128.215 h3.05; Mechanical 12 "BA1" at 184.848,2446.26 h3.05; Mechanical 12 "R11" at 185.228,2276.68 h3.05; Mechanical 12 "R17" at 185.228,2252.68 h3.05; Mechanical 12 "XS2" at 184.707,2230.278 h3.05; Mechanical 12 "C10" at 166.485,2242.896 h3.05; Mechanical 12 "DD6" at 152.587,2214.04 h3.05; Mechanical 12 "*" at 136.989,2147.835 h2.54 r270; Mechanical 12 "VD3" at 116.777,2277.099 h3.05; Mechanical 12 "VT2" at 117.552,2260.662 h3.05; Mechanical 12 "DD3" at 104.058,2407.381 h3.05; Mechanical 12 "R16" at 107.228,2252.68 h3.05; Mechanical 12 "*" at 224.331,2254.565 h2.54 r90; Mechanical 12 "*" at 205.54,2200.93 h2.54; Mechanical 12 "-" at 186.539,2429.454 h2.55 r180; Mechanical 12 "*" at 154.331,2194.565 h2.54 r90; Mechanical 12 "*" at 148.465,2130.565 h2.54 r90; Mechanical 12 "*" at 116.075,2163.702 h2.54 r180
Designator1: Mechanical 7 "92" at 695.836,2450.36 h7.68; Mechanical 7 "88" at 685.68,2450.36 h7.68; Mechanical 7 "84" at 676.074,2450.36 h7.68; Mechanical 7 "80" at 665.595,2450.36 h7.68; Mechanical 7 "76" at 656.231,2450.36 h7.68; Mechanical 7 "72" at 646.014,2450.36 h7.68; Mechanical 7 "68" at 635.68,2450.36 h7.68; Mechanical 7 "64" at 626.074,2450.36 h7.68; Mechanical 7 "60" at 615.595,2450.36 h7.68; Mechanical 7 "56" at 605.879,2450.36 h7.68; Mechanical 7 "52" at 595.662,2450.36 h7.68; Mechanical 7 "48" at 585.733,2450.36 h7.68; Mechanical 7 "44" at 576.128,2450.36 h7.68; Mechanical 7 "40" at 565.648,2450.36 h7.68; Mechanical 7 "36" at 555.879,2450.36 h7.68; Mechanical 7 "32" at 545.662,2450.36 h7.68; Mechanical 7 "28" at 535.555,2450.36 h7.68; Mechanical 7 "24" at 525.95,2450.36 h7.68; Mechanical 7 "20" at 515.47,2450.36 h7.68; Mechanical 7 "16" at 506.775,2450.36 h7.68; Mechanical 7 "12" at 496.558,2450.36 h7.68; Mechanical 7 "8" at 487.29,2450.36 h7.68; Mechanical 7 "4" at 477.738,2450.36 h7.68; Mechanical 7 "0" at 467.205,2450.36 h7.68; Mechanical 7 "140" at 456.867,2093.501 h7.68; Mechanical 7 "136" at 457.691,2103.501 h7.68; Mechanical 7 "132" at 457.258,2113.501 h7.68; Mechanical 7 "128" at 457.037,2123.501 h7.68; Mechanical 7 "124" at 457.827,2133.501 h7.68; Mechanical 7 "120" at 456.867,2143.501 h7.68; Mechanical 7 "116" at 458.402,2153.501 h7.68; Mechanical 7 "112" at 457.969,2163.501 h7.68; Mechanical 7 "108" at 457.037,2173.501 h7.68; Mechanical 7 "104" at 457.827,2183.501 h7.68; Mechanical 7 "100" at 456.867,2193.501 h7.68; Mechanical 7 "96" at 459.106,2203.501 h7.68; Mechanical 7 "92" at 458.673,2213.501 h7.68; Mechanical 7 "88" at 458.36,2223.501 h7.68; Mechanical 7 "84" at 459.149,2233.501 h7.68; Mechanical 7 "80" at 458.189,2243.501 h7.68; Mechanical 7 "76" at 459.462,2253.501 h7.68; Mechanical 7 "72" at 459.028,2263.501 h7.68; Mechanical 7 "68" at 458.36,2273.501 h7.68; Mechanical 7 "64" at 459.149,2283.501 h7.68; Mechanical 7 "60" at 458.189,2293.501 h7.68; Mechanical 7 "56" at 458.758,2303.501 h7.68; Mechanical 7 "52" at 458.324,2313.501 h7.68; Mechanical 7 "48" at 458.466,2323.501 h7.68; Mechanical 7 "44" at 459.256,2333.501 h7.68; Mechanical 7 "40" at 458.296,2343.501 h7.68; Mechanical 7 "36" at 458.758,2353.501 h7.68; Mechanical 7 "32" at 458.324,2363.501 h7.68; Mechanical 7 "28" at 458.111,2373.501 h7.68; Mechanical 7 "24" at 458.9,2383.501 h7.68; Mechanical 7 "20" at 457.94,2393.501 h7.68; Mechanical 7 "16" at 460.549,2403.501 h7.68; Mechanical 7 "12" at 460.116,2413.501 h7.68; Mechanical 7 "8" at 461.58,2423.501 h7.68; Mechanical 7 "4" at 462.476,2433.501 h7.68; Mechanical 7 "0" at 461.41,2443.501 h7.68
Designator1: Mechanical 12 "0.41*" at 402.189,2478 h7.68